# EAGLE board ScorekeeperSchematic (EAGLE 9.5.0)
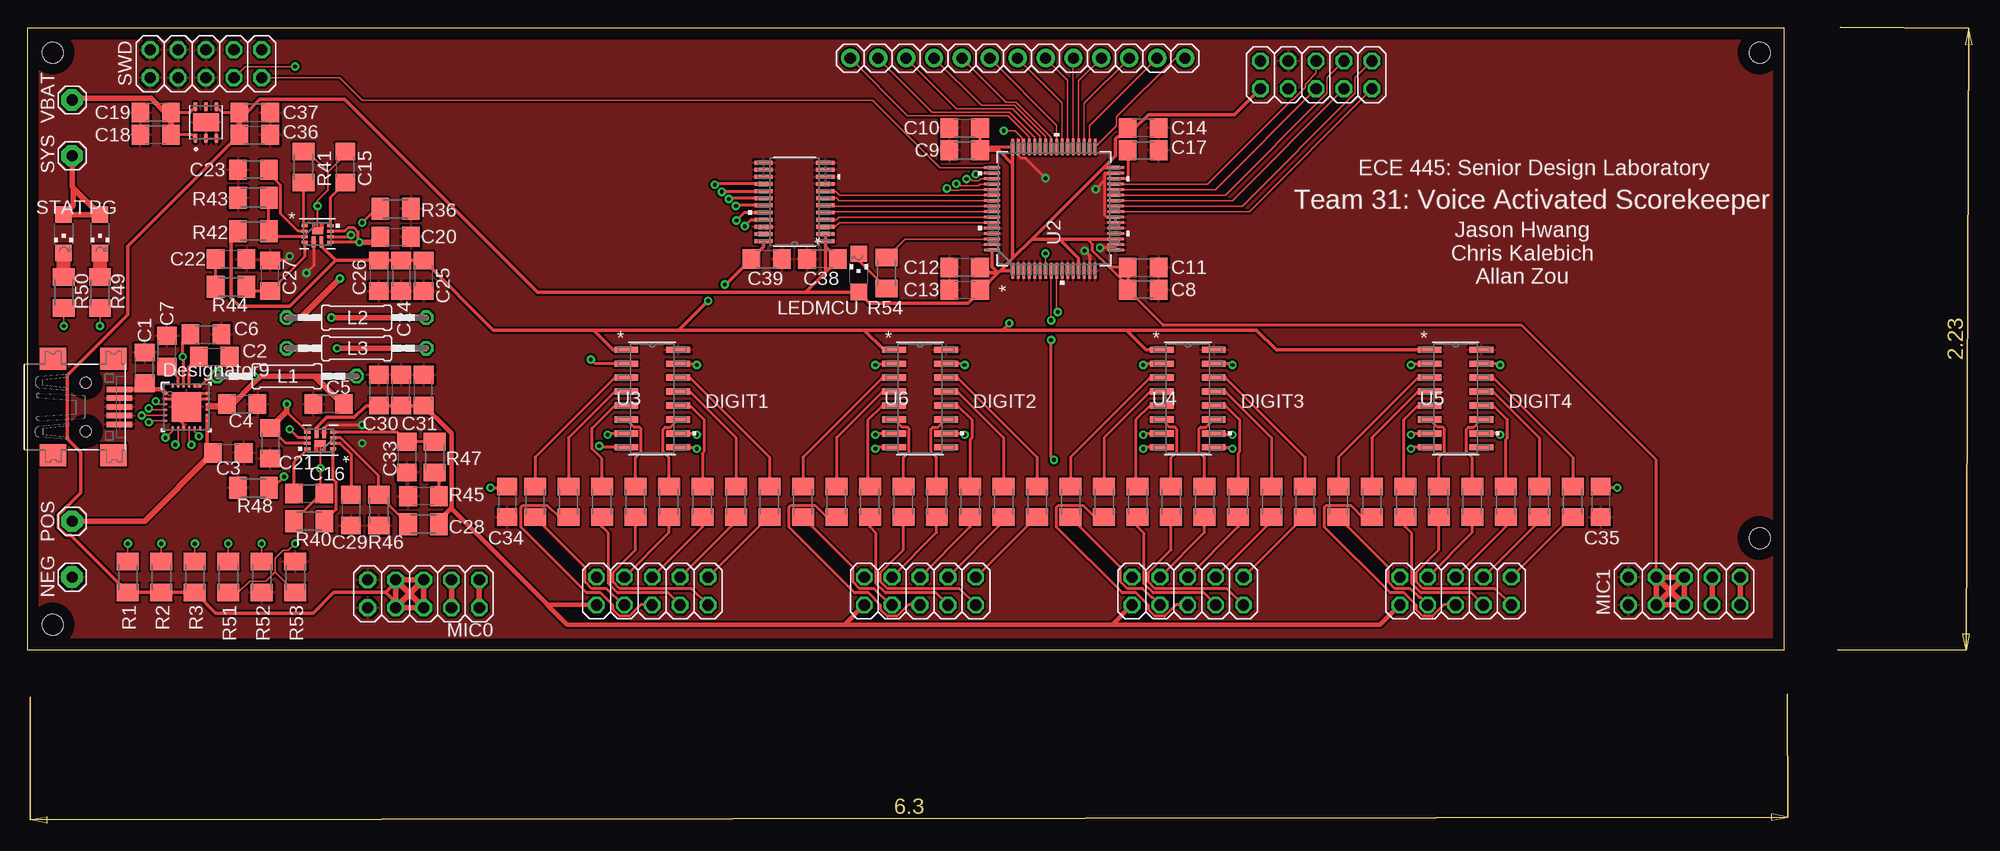
[diagram p0: board, top side]
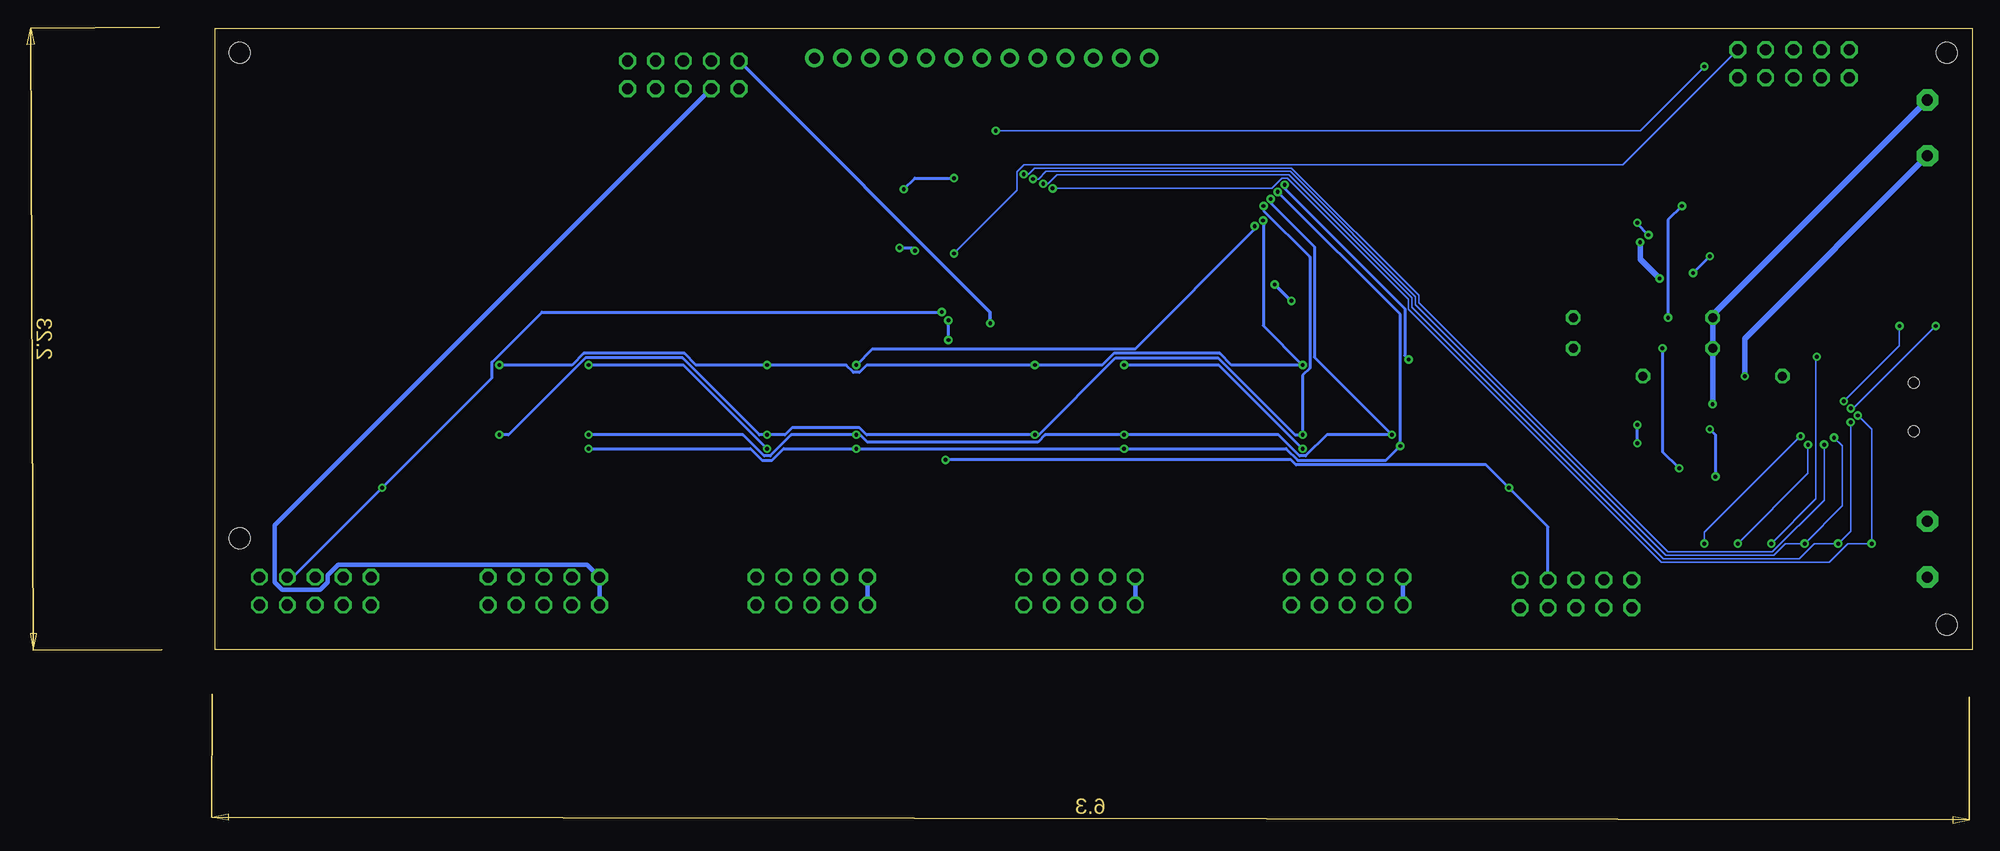
[diagram p1: board, bottom side, seen from below]

Size 160 x 56.57 mm. Coordinates in mm from the lower left corner, seen from the top.
Outline: 0,0 160,0 160,56.57 0,56.57 0,0
Copper layers (1*16): Top 0.035mm / dielectric 1.5mm / Bottom 0.035mm
Design rules "default": minimum track width 6mil, minimum drill 0.35mm, track to track 6mil, track to pad 6mil, pad to pad 6mil, via to via 6mil, smd to smd 6mil, copper to edge 40mil, drill to drill 6mil, minimum pad ring 10mil, minimum via ring 8mil, stop-mask expansion 4mil, vias tented up to drill 0mil, thermal gap 10mil
Holes 1.91 mm at 2.29,54.36 157.73,54.36 157.73,10.16 2.29,2.29

## Footprints (pad centres in the part's own frame; a part is rotated, then mirrored left to right if it is on the bottom)
RNR0011A = smd 0.559 x 0.254: 1 -1.175,0.75; 2 -1.175,0.25; 3 -1.175,-0.25; 4 -1.175,-0.75; 7 1.175,-0.75; 8 1.175,-0.25; 9 1.175,0.25; 10 1.175,0.75 | smd 0.356 x 0.991: 5 -0.35,-0.7; 6 0.35,-0.7 | smd 0.991 x 0.61: 11 0,0.295
RTW0024H = smd 0.36 x 0.24: 1 -1.9,1.25; 2 -1.9,0.75; 3 -1.9,0.25; 4 -1.9,-0.25; 5 -1.9,-0.75; 6 -1.9,-1.25; 13 1.9,-1.25; 14 1.9,-0.75; 15 1.9,-0.25; 16 1.9,0.25; 17 1.9,0.75; 18 1.9,1.25 | smd 0.24 x 0.36: 7 -1.25,-1.9; 8 -0.75,-1.9; 9 -0.25,-1.9; 10 0.25,-1.9; 11 0.75,-1.9; 12 1.25,-1.9; 19 1.25,1.9; 20 0.75,1.9; 21 0.25,1.9; 22 -0.25,1.9; 23 -0.75,1.9; 24 -1.25,1.9 | smd 2.7 x 2.7: 25 0,0 | smd 0.5 x 0.5: V 0,-1.1
C1206 = smd 1.6 x 1.8: 1 -1.4,0; 2 1.4,0
USB-MINIB = smd 0.5 x 2.308: D+ 0,4.064; D- -0.8,4.064; GND 1.6,4.064; ID 0.8,4.064; VBUS -1.6,4.064 | smd 2 x 2.4: GND1 -4.4,-2; GND2 -4.4,3.5; GND3 4.4,3.5; GND4 4.4,-2 | hole 1: -2.2,1; 2.2,1
2X05 = drill 1.016 octagon: 1 -5.08,-1.27; 2 -5.08,1.27; 3 -2.54,-1.27; 4 -2.54,1.27; 5 0,-1.27; 6 0,1.27; 7 2.54,-1.27; 8 2.54,1.27; 9 5.08,-1.27; 10 5.08,1.27
1X13-BIG = drill 1.016 pad 1.676: 1 -15.24,0; 2 -12.7,0; 3 -10.16,0; 4 -7.62,0; 5 -5.08,0; 6 -2.54,0; 7 0,0; 8 2.54,0; 9 5.08,0; 10 7.62,0; 11 10.16,0; 12 12.7,0; 13 15.24,0
0207/12 = drill 0.813 octagon: 1 -6.35,0; 2 6.35,0
CHIPLED_1206 = smd 1.5 x 1.5: A 0,-1.75; C 0,1.75
1X01 = drill 1.016 pad 1.93 octagon: 1 0,0
M1206 = smd 1.6 x 2: 1 -1.4,0; 2 1.4,0
SON95P300X300X100-7N = smd 0.84 x 0.4: 1 -1.435,0.95; 2 -1.435,0; 3 -1.435,-0.95; 4 1.435,-0.95; 5 1.435,0; 6 1.435,0.95 | smd 1.625 x 2.365: 7 0,0
LQFP-64 = smd 1.462 x 0.239: 1 -5.626,3.75; 2 -5.626,3.25; 3 -5.626,2.75; 4 -5.626,2.25; 5 -5.626,1.75; 6 -5.626,1.25; 7 -5.626,0.75; 8 -5.626,0.25; 9 -5.626,-0.25; 10 -5.626,-0.75; 11 -5.626,-1.25; 12 -5.626,-1.75; 13 -5.626,-2.25; 14 -5.626,-2.75; 15 -5.626,-3.25; 16 -5.626,-3.75; 33 5.626,-3.75; 34 5.626,-3.25; 35 5.626,-2.75; 36 5.626,-2.25; 37 5.626,-1.75; 38 5.626,-1.25; 39 5.626,-0.75; 40 5.626,-0.25; 41 5.626,0.25; 42 5.626,0.75; 43 5.626,1.25; 44 5.626,1.75; 45 5.626,2.25; 46 5.626,2.75; 47 5.626,3.25; 48 5.626,3.75 | smd 0.239 x 1.462: 17 -3.75,-5.626; 18 -3.25,-5.626; 19 -2.75,-5.626; 20 -2.25,-5.626; 21 -1.75,-5.626; 22 -1.25,-5.626; 23 -0.75,-5.626; 24 -0.25,-5.626; 25 0.25,-5.626; 26 0.75,-5.626; 27 1.25,-5.626; 28 1.75,-5.626; 29 2.25,-5.626; 30 2.75,-5.626; 31 3.25,-5.626; 32 3.75,-5.626; 49 3.75,5.626; 50 3.25,5.626; 51 2.75,5.626; 52 2.25,5.626; 53 1.75,5.626; 54 1.25,5.626; 55 0.75,5.626; 56 0.25,5.626; 57 -0.25,5.626; 58 -0.75,5.626; 59 -1.25,5.626; 60 -1.75,5.626; 61 -2.25,5.626; 62 -2.75,5.626; 63 -3.25,5.626; 64 -3.75,5.626
D16 = smd 2.173 x 0.568: 1 -2.362,4.445; 2 -2.362,3.175; 3 -2.362,1.905; 4 -2.362,0.635; 5 -2.362,-0.635; 6 -2.362,-1.905; 7 -2.362,-3.175; 8 -2.362,-4.445; 9 2.362,-4.445; 10 2.362,-3.175; 11 2.362,-1.905; 12 2.362,-0.635; 13 2.362,0.635; 14 2.362,1.905; 15 2.362,3.175; 16 2.362,4.445
PW24 = smd 1.676 x 0.356: 1 -2.819,3.575; 2 -2.819,2.925; 3 -2.819,2.275; 4 -2.819,1.625; 5 -2.819,0.975; 6 -2.819,0.325; 7 -2.819,-0.325; 8 -2.819,-0.975; 9 -2.819,-1.625; 10 -2.819,-2.275; 11 -2.819,-2.925; 12 -2.819,-3.575; 13 2.819,-3.575; 14 2.819,-2.925; 15 2.819,-2.275; 16 2.819,-1.625; 17 2.819,-0.975; 18 2.819,-0.325; 19 2.819,0.325; 20 2.819,0.975; 21 2.819,1.625; 22 2.819,2.275; 23 2.819,2.925; 24 2.819,3.575

## Placement (x,y rotation side)
5VBOOST  TPS61089RNRR  [RNR0011A]  26.42,37.85 0 top
12VBOOST  TPS61089RNRR  [RNR0011A]  26.67,19.05 180 top
BQ25896  Value  [RTW0024H]  14.48,22.1 0 top
C1  1uF  [C1206]  10.67,25.65 90 top
C2  4.7nF  [C1206]  17.02,26.67 0 top
C3  10uF  [C1206]  18.29,17.91 0 top
C4  10uF  [C1206]  19.56,22.35 0 top
C5  10uF  [C1206]  27.43,22.35 180 top
C6  4.7uF  [C1206]  16.26,28.7 0 top
C7  8.2uf  [C1206]  12.7,27.18 90 top
C8  4.7uF  [C1206]  101.6,32.77 180 top
C9  100nF  [C1206]  85.34,45.47 0 top
C10  1uF  [C1206]  85.34,47.5 0 top
C11  100nF  [C1206]  101.6,34.8 0 top
C12  100nF  [C1206]  85.34,34.8 180 top
C13  100nF  [C1206]  85.34,32.77 0 top
C14  100uF  [C1206]  101.6,47.5 180 top
C15  0.1uF  [C1206]  28.96,43.94 90 top
C16  0.1uF  [C1206]  25.65,14.22 0 top
C17  4.7uF  [C1206]  101.6,45.47 0 top
C18  0.1uF  [C1206]  11.68,46.86 180 top
C19  1uF  [C1206]  11.68,48.9 180 top
C20  22uF  [C1206]  33.53,37.59 0 top
C21  22uF  [C1206]  22.1,18.8 270 top
C22  4.7nF  [C1206]  18.54,35.56 0 top
C23  2.2uF  [C1206]  20.57,43.69 180 top
C24  22uF  [C1206]  34.04,34.04 270 top
C25  22uF  [C1206]  36.07,34.04 270 top
C26  22uF  [C1206]  32,34.04 270 top
C27  10pF  [C1206]  22.1,34.04 90 top
C28  4.7nF  [C1206]  36.07,13.97 180 top
C29  2.2uF  [C1206]  29.46,12.7 270 top
C30  22uF  [C1206]  36.07,23.62 90 top
C31  22uF  [C1206]  34.04,23.62 90 top
C32  22uF  [C1206]  32,23.62 90 top
C33  10pF  [C1206]  34.54,17.53 270 top
C34  1uF  [C1206]  43.69,13.46 270 top
C35  [C1206]  143.26,13.46 270 top
C36  1uF  [C1206]  20.7,46.86 0 top
C37  0.1uF  [C1206]  20.7,48.9 0 top
C38  0.1uF  [C1206]  72.39,35.56 180 top
C39  0.1uF  [C1206]  67.31,35.56 0 top
CN1  [USB-MINIB]  4.32,22.1 270 top
DIGIT1  [2X05]  56.9,5.33 0 top
DIGIT2  [2X05]  81.28,5.33 0 top
DIGIT3  [2X05]  105.66,5.33 0 top
DIGIT4  [2X05]  130.05,5.33 0 top
JP1  [2X05]  117.35,52.32 0 top
JP2  [1X13-BIG]  90.17,53.85 0 top
L1  1uH  [0207/12]  23.62,24.89 0 top
L2  1.8uH  [0207/12]  29.97,30.23 0 top
L3  1.8uH  [0207/12]  29.97,27.43 0 top
LEDMCU  [CHIPLED_1206]  75.69,34.29 0 top
MIC0  [2X05]  36.07,5.08 0 top
MIC1  [2X05]  150.88,5.33 0 top
NEG  [1X01]  4.06,6.6 0 top
PG  [CHIPLED_1206]  6.6,37.85 180 top
POS  [1X01]  4.06,11.68 0 top
R1  10kO  [M1206]  9.14,6.6 90 top
R2  10kO  [M1206]  12.19,6.6 90 top
R3  10kO  [M1206]  15.24,6.6 90 top
R4  [M1206]  46.23,13.46 270 top
R5  [M1206]  49.28,13.46 270 top
R6  [M1206]  52.32,13.46 270 top
R7  [M1206]  55.37,13.46 270 top
R8  [M1206]  58.42,13.46 270 top
R9  [M1206]  61.47,13.46 270 top
R10  [M1206]  64.52,13.46 270 top
R11  [M1206]  67.56,13.46 270 top
R12  [M1206]  91.95,13.46 270 top
R13  [M1206]  88.9,13.46 270 top
R14  [M1206]  85.85,13.46 270 top
R15  [M1206]  82.8,13.46 270 top
R16  [M1206]  79.76,13.46 270 top
R17  [M1206]  76.71,13.46 270 top
R18  [M1206]  73.66,13.46 270 top
R19  [M1206]  70.61,13.46 270 top
R20  [M1206]  95,13.46 270 top
R21  [M1206]  98.04,13.46 270 top
R22  [M1206]  101.09,13.46 270 top
R23  [M1206]  104.14,13.46 270 top
R24  [M1206]  107.19,13.46 270 top
R25  [M1206]  110.24,13.46 270 top
R26  [M1206]  113.28,13.46 270 top
R27  [M1206]  116.33,13.46 270 top
R28  [M1206]  140.72,13.46 270 top
R29  [M1206]  137.67,13.46 270 top
R30  [M1206]  134.62,13.46 270 top
R31  [M1206]  131.57,13.46 270 top
R32  [M1206]  128.52,13.46 270 top
R33  [M1206]  125.48,13.46 270 top
R34  [M1206]  122.43,13.46 270 top
R35  [M1206]  119.38,13.46 270 top
R36  127kO  [M1206]  33.53,40.13 180 top
R40  300kO  [M1206]  25.65,11.68 180 top
R41  300kO  [M1206]  25.15,43.94 90 top
R42  309kO  [M1206]  20.57,38.1 180 top
R43  100kO  [M1206]  20.57,41.15 0 top
R44  17.4kO  [M1206]  18.54,33.02 0 top
R45  898kO  [M1206]  36.07,11.43 0 top
R46  102kO  [M1206]  32,12.7 90 top
R47  17.4kO  [M1206]  37.08,17.53 90 top
R48  127kO  [M1206]  20.57,14.73 0 top
R49  [M1206]  6.6,32.51 270 top
R50  [M1206]  3.3,32.51 270 top
R51  10kO  [M1206]  18.29,6.6 90 top
R52  260 O  [M1206]  21.34,6.6 90 top
R53  10kO  [M1206]  24.38,6.6 270 top
R54  [M1206]  78.23,34.29 270 top
STAT  [CHIPLED_1206]  3.3,37.85 180 top
SWD  [2X05]  16.26,53.34 180 top
SYS  [1X01]  4.06,44.96 0 top
U1  LD39050PU33R  [SON95P300X300X100-7N]  16.26,48.01 90 top
U2  STM32F401RCT6  [LQFP-64]  93.47,40.13 90 top
U3  TPIC6C596DRQ1  [D16]  56.9,22.86 0 top
U4  TPIC6C596DRQ1  [D16]  105.66,22.86 0 top
U5  TPIC6C596DRQ1  [D16]  130.05,22.86 0 top
U6  TPIC6C596DRQ1  [D16]  81.28,22.86 0 top
U7  SN74LVCC3245APWR  [PW24]  69.85,40.77 180 top
VBAT  [1X01]  4.06,50.04 0 top

## Library data of the parts
5VBOOST 12VBOOST = Scorekeeper; MANUFACTURER_PART_NUMBER: TPS61089RNRR; VENDOR: Texas Instruments
BQ25896 = Scorekeeper; ALTERNATEPARTNUMBER: BQ25896RTWT; APPLICATION_BUILDNUMBER: *; COMPTYPE: IC; MANUFACTURER: Texas Instruments; MOUNTTYPE: SMT; PACKAGEREFERENCE: RTW0024H; PARTNUMBER: BQ25896RTWR; PIN_COUNT: 25; REFDES: RefDes; ROHS: Y; TYPE: TYPE
C1-C39 CN1 JP2 LEDMCU NEG PG POS R1-R36 R40-R54 STAT SYS VBAT = adafruit
DIGIT1-DIGIT4 JP1 MIC0 MIC1 SWD = pinhead
L1-L3 = rcl; SPICEPREFIX: L
U1 = LD39050PU33R; DESCRIPTION: LDO Regulator Pos 3.3V 0.5A 6-Pin DFN EP T/R; DIGI-KEY_PART_NUMBER: 497-8716-1-ND; DIGI-KEY_PURCHASE_URL: https://www.digikey.com/product-detail/en/stmicroelectronics/LD39050PU33R/497-8716-1-ND/2039901?utm_source=snapeda&utm_medium=aggregator&utm_campaign=symbol; MF: STMicroelectronics; MP: LD39050PU33R; PACKAGE: DFN-6 STMicroelectronics
U2 = Scorekeeper; MANUFACTURER_PART_NUMBER: STM32F401RCT6; VENDOR: STMicroelectronics
U3-U6 = Scorekeeper; MANUFACTURER_PART_NUMBER: TPIC6C596DRQ1; VENDOR: Texas Instruments
U7 = Scorekeeper; BUILT_BY: EMA_UL_Team; MANUFACTURER: Texas Instruments; MANUFACTURER_PART_NUMBER: SN74LVCC3245APWR; VENDOR: Texas Instruments

## Nets
1A: R4.1 U3.3
1B: R5.1 U3.4
1C: R6.1 U3.5
1D: R7.1 U3.6
1E: R8.1 U3.11
1F: R9.1 U3.12
1G: R10.1 U3.13
1P: R11.1 U3.14
2A: R19.1 U6.3
2B: R18.1 U6.4
2C: R17.1 U6.5
2D: R16.1 U6.6
2E: R15.1 U6.11
2F: R14.1 U6.12
2G: R13.1 U6.13
2P: R12.1 U6.14
3A: R20.1 U4.3
3B: R21.1 U4.4
3C: R22.1 U4.5
3D: R23.1 U4.6
3E: R24.1 U4.11
3F: R25.1 U4.12
3G: R26.1 U4.13
3P: R27.1 U4.14
4A: R35.1 U5.3
4B: R34.1 U5.4
4C: R33.1 U5.5
4D: R32.1 U5.6
4E: R31.1 U5.11
4F: R30.1 U5.12
4G: R29.1 U5.13
4P: R28.1 U5.14
AGND: 5VBOOST.5 12VBOOST.5 BQ25896.2 BQ25896.9 BQ25896.17 BQ25896.18 BQ25896.25 C1.2 C3.2 C4.2 C5.2 C6.2 C7.2 C8.1 C9.1 C10.1 C11.2 C12.2 C13.1 C14.1 C17.2 C18.2 C19.2 C20.2 C21.2 C22.2 C23.2 C24.2 C25.2 C26.2 C27.2 C28.2 C29.2 C30.2 C31.2 C32.2 C33.2 C34.2 C35.2 C36.2 C37.2 C38.2 C39.2 CN1.D+ CN1.D- CN1.GND CN1.ID JP1.4 MIC0.1 MIC0.2 MIC1.1 MIC1.2 NEG.1 R36.1 R43.1 R46.1 R48.1 R52.1 R53.1 SWD.5 SWD.6 SWD.7 SWD.8 SWD.9 SWD.10 U1.2 U1.3 U1.7 U2.2 U2.3 U2.4 U2.5 U2.6 U2.10 U2.11 U2.12 U2.14 U2.15 U2.16 U2.17 U2.18 U2.20 U2.21 U2.22 U2.23 U2.31 U2.47 U2.60 U2.61 U2.63 U3.16 U4.16 U5.16 U6.16 U7.9 U7.10 U7.11 U7.12 U7.13 U7.14 U7.15 U7.22
BAT_POS: BQ25896.13 BQ25896.14 C3.1 POS.1
CLEARH: U3.7 U4.7 U5.7 U6.7 U7.18
CLEARL: U2.56 U7.6
G_H: U3.8 U4.8 U5.8 U6.8 U7.17
G_L: U2.55 U7.7
INT: BQ25896.7 R3.2 U2.51
LED: R54.1 U2.62
LISTEN: JP1.5 U2.28
MIC0: C34.1 MIC0.7 MIC0.8 U2.8
MIC1: C35.1 MIC1.7 MIC1.8 U2.9
N$1: BQ25896.1 C1.1 CN1.VBUS
N$2: U3.9 U6.2
N$3: BQ25896.19 BQ25896.20 C2.2 L1.1
N$4: BQ25896.21 C2.1
N$5: JP2.13 U2.33
N$6: BQ25896.11 R51.1 R53.2
N$7: JP2.12 U2.34
N$8: BQ25896.23 C7.1
N$9: JP2.11 U2.35
N$10: U4.9 U5.2
N$11: 12VBOOST.11 C16.2 L3.2 R40.2
N$12: 5VBOOST.11 C15.2 L2.2 R41.2
N$13: JP2.10 U2.36
N$14: C17.1 U2.30
N$15: DIGIT1.4 R8.2
N$16: DIGIT1.6 R9.2
N$17: DIGIT1.8 R10.2
N$18: DIGIT1.10 R11.2
N$19: DIGIT3.4 R24.2
N$20: DIGIT3.6 R25.2
N$21: DIGIT3.8 R26.2
N$22: DIGIT3.10 R27.2
N$23: DIGIT2.4 R15.2
N$24: DIGIT2.10 R12.2
N$25: DIGIT2.8 R13.2
N$26: DIGIT2.6 R14.2
N$27: DIGIT4.10 R28.2
N$28: DIGIT2.9 R16.2
N$29: DIGIT2.7 R17.2
N$30: DIGIT2.5 R18.2
N$31: DIGIT2.3 R19.2
N$32: DIGIT4.8 R29.2
N$33: DIGIT4.6 R30.2
N$34: DIGIT4.4 R31.2
N$35: JP2.9 U2.37
N$36: DIGIT4.9 R32.2
N$37: DIGIT4.7 R33.2
N$38: DIGIT4.5 R34.2
N$39: DIGIT4.3 R35.2
N$40: JP2.8 U2.38
N$41: JP2.7 U2.39
N$42: JP2.6 U2.40
N$43: JP2.5 U2.41
N$44: PG.C R49.1
N$45: R50.1 STAT.C
N$46: BQ25896.3 R49.2
N$47: LEDMCU.C R54.2
N$48: JP2.4 U2.42
N$49: JP2.3 U2.43
N$50: DIGIT1.9 R7.2
N$51: DIGIT1.7 R6.2
N$52: DIGIT1.5 R5.2
N$53: DIGIT1.3 R4.2
N$54: JP2.2 U2.44
N$55: JP2.1 U2.45
N$66: DIGIT3.9 R23.2
N$67: DIGIT3.7 R22.2
N$68: DIGIT3.5 R21.2
N$69: DIGIT3.3 R20.2
N$96: 5VBOOST.10 C15.1
N$97: 12VBOOST.10 C16.1
N$98: 12VBOOST.1 R40.1
N$99: 5VBOOST.2 C23.1
N$100: 5VBOOST.1 R41.1
N$101: 5VBOOST.3 R42.1 R43.2
N$102: C22.1 R44.1
N$103: 5VBOOST.4 C27.1 R44.2
N$104: 5VBOOST.8 R36.2
N$105: 12VBOOST.2 C29.1
N$106: 12VBOOST.3 R45.1 R46.2
N$107: C28.1 R47.1
N$108: 12VBOOST.4 C33.1 R47.2
N$109: 12VBOOST.8 R48.2
N$111: BQ25896.22 C6.1 R51.2
N$112: MIC0.9 MIC0.10
N$113: BQ25896.10 R52.2
N$116: MIC1.9 MIC1.10
NRST: SWD.1 U2.7
OTG: BQ25896.8 U2.50
RCKH: U3.10 U4.10 U5.10 U6.10 U7.19
RCKL: U2.57 U7.5
RESET: JP1.6 U2.29
SCL: BQ25896.5 R1.2 U2.53
SDA: BQ25896.6 R2.2 U2.52
SRCKH: U3.15 U4.15 U5.15 U6.15 U7.20
SRCKL: U2.58 U7.4
STAT: BQ25896.4 R50.2
SWCLK: SWD.2 U2.49
SWDIO: SWD.4 U2.46
SYS: BQ25896.15 BQ25896.16 C4.1 C5.1 L1.2 PG.A STAT.A SYS.1
T1DOWN: JP1.9 U2.24
T1UP: JP1.7 U2.26
T2DOWN: JP1.10 U2.25
T2UP: JP1.8 U2.27
TEAM1H: U3.2 U7.16
TEAM1L: U2.54 U7.8
TEAM2H: U4.2 U7.21
TEAM2L: U2.59 U7.3
VBAT: 5VBOOST.7 5VBOOST.9 12VBOOST.7 12VBOOST.9 C18.1 C19.1 C20.1 C21.1 L2.1 L3.1 U1.1 U1.6 VBAT.1
VREF5: 5VBOOST.6 C24.1 C25.1 C26.1 C39.1 JP1.2 R42.2 U3.1 U4.1 U5.1 U6.1 U7.24
VREF12: 12VBOOST.6 C30.1 C31.1 C32.1 DIGIT1.1 DIGIT1.2 DIGIT2.1 DIGIT2.2 DIGIT3.1 DIGIT3.2 DIGIT4.1 DIGIT4.2 JP1.3 R45.2
VREF33: C8.2 C9.2 C10.2 C11.1 C12.1 C13.2 C14.2 C36.1 C37.1 C38.1 JP1.1 LEDMCU.A MIC0.3 MIC0.4 MIC0.5 MIC0.6 MIC1.3 MIC1.4 MIC1.5 MIC1.6 R1.1 R2.1 R3.1 U1.4 U2.1 U2.13 U2.19 U2.32 U2.48 U2.64 U7.1 U7.2

## Tracks (layer width: path | path; a pad name or v marks a point on that pad's centre or on a via)
1A
  Top 0.254: U3.3 53.47,24.77 46.23,17.53 R4.1
1B
  Top 0.254: U3.4 53.47,23.5 49.28,19.3 R5.1
1C
  Top 0.254: U3.5 53.47,22.23 51.41,20.17 51.41,18.27 52.32,17.36 R6.1
1D
  Top 0.254: U3.6 55.24,20.25 55.74,20.25 55.9,20.09 55.9,18.02 55.37,17.49 R7.1
1E
  Top 0.254: U3.11 58.55,20.25 58.06,20.25 57.89,20.09 57.89,18.02 58.42,17.49 R8.1
1F
  Top 0.254: U3.12 60.33,22.23 61.62,20.93 61.62,18.02 61.47,17.87 R9.1
1G
  Top 0.254: U3.13 60.33,23.5 64.52,19.3 R10.1
1P
  Top 0.254: U3.14 60.33,24.77 67.56,17.53 R11.1
2A
  Top 0.254: U6.3 77.85,24.77 70.61,17.53 R19.1
2B
  Top 0.254: U6.4 77.85,23.5 73.66,19.3 R18.1
2C
  Top 0.254: U6.5 77.85,22.23 76.56,20.93 76.56,15.01 R17.1
2D
  Top 0.254: U6.6 79.62,20.25 80.12,20.25 80.28,20.09 80.28,18.02 79.76,17.49 R16.1
2E
  Top 0.254: U6.11 82.94,20.25 82.44,20.25 82.28,20.09 82.28,18.02 82.8,17.49 R15.1
2F
  Top 0.254: U6.12 84.71,22.23 86,20.93 86,19.29 85.85,19.14 R14.1
2G
  Top 0.254: U6.13 84.71,23.5 88.9,19.3 R13.1
2P
  Top 0.254: U6.14 84.71,24.77 91.95,17.53 R12.1
3A
  Top 0.254: U4.3 102.23,24.77 95,17.53 R20.1
3B
  Top 0.254: U4.4 102.23,23.5 98.04,19.3 R21.1
3C
  Top 0.254: U4.5 102.23,22.23 100.97,20.95 100.97,19.85 100.94,19.83 100.94,15.01 R22.1
3D
  Top 0.254: U4.6 104.01,20.25 104.5,20.25 104.67,20.09 104.67,18.02 104.14,17.49 R23.1
3E
  Top 0.254: U4.11 107.32,20.25 106.82,20.25 106.66,20.09 106.66,18.02 107.19,17.49 R24.1
3F
  Top 0.254: U4.12 109.09,22.23 110.39,20.93 110.39,18.02 110.24,17.87 R25.1
3G
  Top 0.254: U4.13 109.09,23.5 113.28,19.3 R26.1
3P
  Top 0.254: U4.14 109.09,24.77 116.33,17.53 R27.1
4A
  Top 0.254: U5.3 126.62,24.77 119.38,17.53 R35.1
4B
  Top 0.254: U5.4 126.62,23.5 122.43,19.3 R34.1
4C
  Top 0.254: U5.5 126.62,22.23 125.33,20.93 125.33,15.01 R33.1
4D
  Top 0.254: U5.6 128.39,20.25 128.89,20.25 129.05,20.09 129.05,18.02 128.52,17.49 R32.1
4E
  Top 0.254: U5.11 131.7,20.25 131.21,20.25 131.04,20.09 131.04,18.02 131.57,17.49 R31.1
4F
  Top 0.254: R30.1 134.62,19.14 134.77,19.29 134.77,20.93 133.48,22.23 U5.12
4G
  Top 0.254: U5.13 133.48,23.5 137.67,19.3 R29.1
4P
  Top 0.254: U5.14 133.48,24.77 140.72,17.53 R28.1
AGND  (via drill 0.35)
  Top 0.254: BQ25896.2 13.73,22.85 BQ25896.25 | BQ25896.25 15.73,23.35 BQ25896.18 | BQ25896.25 15.23,22.85 BQ25896.17 | BQ25896.25 14.48,21.75 13.95,21.22 13.95,20.78 14.23,20.5 BQ25896.9 | U2.23 99.09,39.37 98.3,39.37 98.09,39.58 98.09,43.36 98.11,43.38 U2.31 99,43.29 98.26,43.29 98.09,43.12 98.09,42.72 v97.28,41.91 | 12VBOOST.5 27.02,20.16 27.32,20.46 v30.48,20.46 | v92.71,42.93 90.89,44.75 90.49,44.75 90.22,45.01 U2.47 | U2.18 98.79,36.58 v97.66,36.58 | v96.27,36.32 96.72,35.87 U2.15 | 5VBOOST.5 26.07,34.96 v25.4,34.29 | v23.88,35.81 23.5,35.44 C27.2
  Bottom 0.254: v97.28,41.91 96.27,42.93 v92.71,42.93 | v97.66,36.58 96.52,36.58 v96.27,36.32 | v25.4,34.29 v23.88,35.81 | v30.48,18.8 v30.48,20.46
  pour Top (isolate 0.178): 0.25,56.39 159.77,56.39 159.77,0.25 0.25,0.25
BAT_POS
  Top 0.254: BQ25896.14 BQ25896.13
  Top 0.33: C3.1 16.38,18.42 BQ25896.14
  Top 0.508: POS.1 10.66,11.68 C3.1
CLEARH  (via drill 0.35)
  Top 0.254: v52.83,19.56 52.96,19.68 U3.7 | v77.22,19.56 77.34,19.68 U6.7 | v101.6,19.56 101.73,19.68 U4.7 | v125.98,19.56 126.11,19.68 U5.7 | U7.18 63.94,41.09 v63.87,41.03
  Bottom 0.254: v125.98,19.56 111.93,19.56 110,17.63 109.46,17.63 107.53,19.56 v101.6,19.56 101.25,19.56 100.59,18.9 85.07,18.9 84.41,19.56 v77.22,19.56 63.16,19.56 61.23,17.63 60.69,17.63 58.76,19.56 v52.83,19.56 59.9,26.62 59.9,36.7 63.87,40.67 v63.87,41.03
CLEARL
  Top 0.152: U2.56 72.73,40.38 U7.6
G_H  (via drill 0.35)
  Top 0.254: U3.8 52.2,18.41 v52.07,18.54 | U6.8 77.34,18.41 v77.22,18.29 | U4.8 101.73,18.41 v101.6,18.29 | U5.8 126.11,18.41 v125.98,18.29 | v63.23,41.67 63.3,41.74 U7.17
  Bottom 0.254: v125.98,18.29 111.23,18.29 110.17,17.22 109.29,17.22 108.22,18.29 v101.6,18.29 v77.22,18.29 62.47,18.29 61.4,17.22 53.39,17.22 v52.07,18.54 52.07,30.51 v63.23,41.67
G_L
  Top 0.152: U2.55 73.93,40.88 73.66,41.15 72.72,41.15 U7.7
INT  (via drill 0.35)
  Top 0.152: BQ25896.7 13.23,19.94 12.86,19.58 12.85,19.58 v12.57,19.3 | v15.24,9.65 R3.2 | U2.51 86.83,42.88 86.61,42.67 86.11,42.67 85.94,42.84 v85.51,42.84
  Bottom 0.152: v12.57,19.3 11.81,18.54 11.81,13.08 v15.24,9.65 17,9.65 18.07,8.59 27.89,8.59 50.7,31.39 50.7,32.14 62.08,43.53 84.33,43.53 85.02,42.84 v85.51,42.84
LED
  Top 0.152: U2.62 79.92,37.38 R54.1
LISTEN
  Top 0.152: JP1.5 108.18,41.88 U2.28
MIC0  (via drill 0.35)
  Top 0.152: v93.22,29.97 U2.8
  Top 0.254: v42.16,14.73 43.56,14.73 C34.1 | v93.47,17.27 93.22,17.53 v93.22,28.19
  Top 0.508: MIC0.7 MIC0.8
  Bottom 0.254: MIC0.8 38.61,11.18 v42.16,14.73 44.25,16.82 61.57,16.82 62.02,17.27 v93.47,17.27 | v93.22,28.19 v93.22,29.97
MIC1  (via drill 0.35)
  Top 0.152: v93.83,30.73 93.72,30.84 U2.9
  Top 0.254: v144.78,14.73 143.39,14.73 C35.1
  Top 0.508: MIC1.7 MIC1.8
  Bottom 0.254: MIC1.8 152.91,6.6 v144.78,14.73 134.77,24.74 134.77,26.18 130.22,30.73 v93.83,30.73
N$1
  Top 0.406: CN1.VBUS 10.11,23.7 | 10.11,23.7 12.23,23.7 BQ25896.1 | C1.1 10.11,23.7
N$2  (via drill 0.35)
  Top 0.254: U3.9 60.83,18.41 v60.96,18.29 | v77.22,25.91 77.34,26.04 U6.2
  Bottom 0.254: v60.96,18.29 68.58,25.91 v77.22,25.91
N$3
  Top 0.254: BQ25896.20 BQ25896.19 | C2.2 18.4,26.67 BQ25896.19 | BQ25896.19 16.62,24.89 L1.1
N$4
  Top 0.254: BQ25896.21 14.73,25.78 C2.1
N$5
  Top 0.152: U2.33 99.17,47.71 99.17,48.49 104.53,53.85 JP2.13
N$6  (via drill 0.35)
  Top 0.152: v15.62,19.43 15.23,19.82 BQ25896.11 | R51.1 19.21,5.2 20.24,6.23 21.69,6.23 22.57,7.11 | v24.38,9.65 23.77,9.03 23.29,9.03 22.57,8.31 22.57,7.11 | R53.2 22.57,7.02 22.57,7.11
  Bottom 0.152: v24.38,9.65 24.38,10.67 v15.62,19.43
N$7
  Top 0.152: U2.34 96.72,47.7 JP2.12
N$8
  Top 0.254: BQ25896.23 13.73,24.75 C7.1
N$9
  Top 0.152: U2.35 96.22,49.74 JP2.11
N$10  (via drill 0.35)
  Top 0.254: U4.9 109.6,18.41 v109.73,18.29 | v125.98,25.91 126.11,26.04 U5.2
  Bottom 0.254: v109.73,18.29 117.35,25.91 v125.98,25.91
N$11  (via drill 0.35)
  Top 0.191: 12VBOOST.11 v26.67,16.51 26.67,14.61
  Top 0.254: 26.67,14.61 C16.2 26.79,14.22 R40.2
  Top 0.508: L3.2 v28.19,27.43
  Bottom 0.254: v26.67,16.51 28.19,18.03 v28.19,27.43
N$12  (via drill 0.35)
  Top 0.191: 5VBOOST.11 v26.42,40.39 26.42,40.89 27.37,41.85 27.37,43.5 | 28.96,45.09 27.37,43.5 | 27.37,43.5 25.65,45.21 25.15,45.21
  Top 0.203: 25.15,45.21 R41.2
  Top 0.254: 28.96,44.96 28.96,45.09 C15.2
  Top 0.508: L2.2 v27.69,30.23
  Bottom 0.254: v26.42,40.39 27.69,39.12 v27.69,30.23
N$13
  Top 0.152: U2.36 95.72,51.78 JP2.10
N$14
  Top 0.254: C17.1 100.2,43.05 100.03,42.88 U2.30
N$15
  Top 0.254: DIGIT1.4 58.42,10.67 R8.2
N$16
  Top 0.254: DIGIT1.6 61.47,11.18 R9.2
N$17
  Top 0.254: DIGIT1.8 64.52,11.68 R10.2
N$18
  Top 0.254: DIGIT1.10 67.43,12.06 R11.2
N$19
  Top 0.254: DIGIT3.4 107.19,10.67 R24.2
N$20
  Top 0.254: DIGIT3.6 110.24,11.18 R25.2
N$21
  Top 0.254: DIGIT3.8 113.28,11.68 R26.2
N$22
  Top 0.254: DIGIT3.10 116.2,12.06 R27.2
N$23
  Top 0.254: DIGIT2.4 82.8,10.67 R15.2
N$24
  Top 0.254: DIGIT2.10 91.82,12.06 R12.2
N$25
  Top 0.254: DIGIT2.8 88.9,11.68 R13.2
N$26
  Top 0.254: DIGIT2.6 85.85,11.18 R14.2
N$27
  Top 0.254: DIGIT4.10 140.59,12.06 R28.2
N$28
  Top 0.254: DIGIT2.9 84.86,5.56 78.31,5.56 77.7,6.17 77.7,7.04 79.76,9.09 R16.2
N$29
  Top 0.254: R17.2 76.71,11.18 77.29,10.59 77.29,6 78.14,5.16 82.73,5.16 DIGIT2.7
N$30
  Top 0.254: DIGIT2.5 80.21,4.06 79.17,3.02 78.31,3.02 77.7,3.63 77.7,4.04 76.58,5.16 75.32,5.16 69.33,11.15 69.33,12.98 69.5,13.14 71.73,13.14 72.81,12.06 R18.2
N$31
  Top 0.254: DIGIT2.3 78.61,4.06 77.11,5.56 75.77,5.56 75.16,6.17 75.16,7.51 R19.2
N$32
  Top 0.254: DIGIT4.8 137.67,11.68 R29.2
N$33
  Top 0.254: DIGIT4.6 134.62,11.18 R30.2
N$34
  Top 0.254: DIGIT4.4 131.57,10.67 R31.2
N$35
  Top 0.152: U2.37 95.22,53.82 JP2.9
N$36
  Top 0.254: DIGIT4.9 133.63,5.56 127.08,5.56 126.47,6.17 126.47,7.04 128.52,9.09 R32.2
N$37
  Top 0.254: R33.2 125.48,11.18 126.06,10.59 126.06,6 126.91,5.16 131.5,5.16 DIGIT4.7
N$38
  Top 0.254: DIGIT4.5 128.98,4.06 127.94,3.02 127.08,3.02 126.47,3.63 126.47,4.04 125.35,5.16 124.09,5.16 118.1,11.15 118.1,12.98 118.26,13.14 120.5,13.14 121.58,12.06 R34.2
N$39
  Top 0.254: DIGIT4.3 126.82,4.75 126.74,4.75 125.93,5.56 124.54,5.56 123.93,6.17 123.93,7.51 R35.2
N$40
  Top 0.152: U2.38 94.72,51.84 JP2.8
N$41
  Top 0.152: U2.39 94.22,49.8 JP2.7
N$42
  Top 0.152: U2.40 93.72,47.76 JP2.6
N$43
  Top 0.152: JP2.5 89.09,49.85 90.03,49.85 93.22,46.66 U2.41
N$44
  Top 1.27: R49.1 PG.C
N$45
  Top 1.27: R50.1 STAT.C
N$46  (via drill 0.35)
  Top 0.152: BQ25896.3 11.94,22.35 v11.68,22.61 | v6.6,29.46 R49.2
  Bottom 0.152: v11.68,22.61 6.6,27.69 v6.6,29.46
N$47
  Top 0.254: R54.2 75.69,35.43 LEDMCU.C
N$48
  Top 0.152: U2.42 92.72,46.72 89.91,49.54 86.86,49.54 JP2.4
N$49
  Top 0.152: U2.43 92.22,46.72 89.7,49.24 84.62,49.24 JP2.3
N$50
  Top 0.254: DIGIT1.9 60.48,5.56 53.92,5.56 53.31,6.17 53.31,7.04 55.37,9.09 R7.2
N$51
  Top 0.254: R6.2 52.32,11.18 52.91,10.59 52.91,6 53.76,5.16 58.34,5.16 DIGIT1.7
N$52
  Top 0.254: R5.2 49.28,11.94 48.55,11.94 47.34,13.14 45.11,13.14 44.95,12.98 44.95,11.15 50.94,5.16 52.2,5.16 53.31,4.04 53.31,3.63 53.92,3.02 54.79,3.02 55.83,4.06 DIGIT1.5
N$53
  Top 0.254: DIGIT1.3 54.23,4.06 52.73,5.56 51.38,5.56 50.77,6.17 50.77,7.51 R4.2
N$54
  Top 0.152: JP2.2 82.39,48.93 89.42,48.93 91.72,46.63 U2.44
N$55
  Top 0.152: U2.45 91.22,46.7 89.3,48.63 80.15,48.63 JP2.1
N$66
  Top 0.254: DIGIT3.9 109.25,5.56 102.69,5.56 102.08,6.17 102.08,7.04 104.14,9.09 R23.2
N$67
  Top 0.254: R22.2 101.09,11.18 101.68,10.59 101.68,6 102.52,5.16 107.11,5.16 DIGIT3.7
N$68
  Top 0.254: DIGIT3.5 104.6,4.06 103.56,3.02 102.69,3.02 102.08,3.63 102.08,4.04 100.97,5.16 99.71,5.16 93.72,11.15 93.72,12.98 93.88,13.14 96.11,13.14 97.19,12.06 R21.2
N$69
  Top 0.254: DIGIT3.3 102.44,4.75 102.36,4.75 101.54,5.56 100.15,5.56 99.54,6.17 99.54,7.51 R20.2
N$96
  Top 0.254: 5VBOOST.10 27.59,41.18 C15.1
N$97
  Top 0.254: 12VBOOST.10 24.3,17.1 24.25,17.06 C16.1
N$98
  Top 0.254: 12VBOOST.1 27.84,15.53 28.13,15.24 28.13,12.76 R40.1
N$99
  Top 0.254: 5VBOOST.2 24.64,38.1 23.05,39.69 23.05,42.26 21.97,43.34 C23.1
N$100
  Top 0.254: 5VBOOST.1 25.15,38.69 R41.1
N$101
  Top 0.254: 5VBOOST.3 22.48,37.6 R42.1 R43.2
N$102
  Top 0.254: R44.1 C22.1
N$103
  Top 0.254: 5VBOOST.4 25.24,35.78 C27.1 20.33,32.64 R44.2
N$104  (via drill 0.35)
  Top 0.254: 5VBOOST.8 29.32,37.6 v29.46,37.74 | v30.48,38.86 31.75,40.13 R36.2
  Bottom 0.254: v29.46,37.74 30.48,38.76 v30.48,38.86
N$105
  Top 0.254: 12VBOOST.2 28.45,18.8 29.46,17.78 C29.1
N$106
  Top 0.254: R45.1 R46.2 32,15.81 28.52,19.3 12VBOOST.3
  Top 0.33: R45.1
N$107
  Top 0.254: C28.1 37.47,15.24 37.47,15.74 R47.1
N$108
  Top 0.254: R47.2 C33.1 33.67,19.8 12VBOOST.4
N$109  (via drill 0.35)
  Top 0.254: 12VBOOST.8 24.64,19.3 v23.88,20.07 | v23.37,15.75 22.35,14.73 R48.2
  Bottom 0.254: v23.88,20.07 23.37,19.56 v23.37,15.75
N$111  (via drill 0.35)
  Top 0.152: v18.29,9.65 R51.2
  Top 0.254: BQ25896.22 14.23,26.57 v14.13,26.67 14.13,27.98 C6.1
  Bottom 0.152: v14.13,26.67 14.22,26.58 14.22,13.72 v18.29,9.65
N$112
  Top 0.508: MIC0.9 MIC0.10
N$113  (via drill 0.35)
  Top 0.152: v21.34,9.65 R52.2 | BQ25896.10 14.73,18.86 v14.94,18.65
  Bottom 0.152: v21.34,9.65 14.94,16.05 v14.94,18.65
N$116
  Top 0.508: MIC1.9 MIC1.10
NRST  (via drill 0.35)
  Top 0.152: U2.7 92.72,36.06 v92.71,36.07
  Bottom 0.152: SWD.1 31.81,44.14 86.35,44.14 86.97,43.53 86.97,41.81 v92.71,36.07
OTG  (via drill 0.35)
  Top 0.152: U2.50 86.47,43.38 v86.36,43.27 | BQ25896.8 13.73,18.93 v13.47,18.67 v13.47,18.66
  Bottom 0.152: v86.36,43.27 85.93,43.27 85.37,43.84 61.96,43.84 50.39,32.27 50.39,31.6 27.69,8.89 18.29,8.89 18.19,8.89 13.47,13.61 v13.47,18.66
RCKH  (via drill 0.35)
  Top 0.254: U3.10 60.83,19.68 v60.96,19.56 | U6.10 85.22,19.68 v85.34,19.56 | v109.73,19.56 108.15,19.56 U4.10 | v134.11,19.56 133.99,19.68 U5.10 | U7.19 64.57,40.44 v64.52,40.39
  Bottom 0.254: v134.11,19.56 133.26,19.56 126.26,26.57 117.43,26.57 110.42,19.56 v109.73,19.56 108.1,19.56 107.44,20.22 101.33,20.22 100.67,19.56 v85.34,19.56 84.99,19.56 77.98,26.57 68.66,26.57 61.66,19.56 v60.96,19.56 60.96,24.98 60.3,25.64 60.3,35.74 64.52,39.96 v64.52,40.39
RCKL
  Top 0.152: U2.57 72.76,39.88 U7.5
RESET
  Top 0.152: U2.29 107.44,42.38 115.12,50.06 115.22,50.06 116.36,51.2 116.36,51.46 117.35,52.45 JP1.6
SCL  (via drill 0.35)
  Top 0.152: BQ25896.5 10.43,21.35 v10.4,21.32 | v9.14,9.65 R1.2 | U2.53 84.9,41.88 84.83,41.81 83.9,41.81 v83.73,41.99
  Bottom 0.152: v10.4,21.32 9.14,20.07 v9.14,9.65 11.33,9.65 13.01,7.98 28.3,7.98 51.31,30.99 51.31,31.89 62.34,42.92 62.84,42.92 63.77,41.99 v83.73,41.99
SDA  (via drill 0.35)
  Top 0.152: BQ25896.6 11.21,20.85 v11.06,20.69 | v12.19,9.65 R2.2 | U2.52 86.76,42.38 86.61,42.23 84.77,42.23 v84.58,42.42
  Bottom 0.152: v11.06,20.69 11.06,10.79 v12.19,9.65 14.38,9.65 15.75,8.28 28.09,8.28 51,31.19 51,32.02 62.21,43.23 83.35,43.23 84.16,42.42 v84.58,42.42
SRCKH  (via drill 0.35)
  Top 0.254: U3.15 60.83,26.04 v60.96,25.91 | v85.34,25.91 85.22,26.04 U6.15 | v109.73,25.91 109.6,26.04 U4.15 | v134.11,25.91 133.99,26.04 U5.15 | U7.20 65.28,39.79 v64.56,39.07
  Bottom 0.254: v134.11,25.91 127.49,25.91 126.42,26.97 117.26,26.97 116.2,25.91 v109.73,25.91 102.53,25.91 101.87,25.25 101.33,25.25 100.67,25.91 v85.34,25.91 79.21,25.91 78.15,26.97 68.5,26.97 67.43,25.91 v60.96,25.91 64.55,29.49 64.55,39.06 v64.56,39.07
SRCKL
  Top 0.152: U2.58 73.93,39.38 73.66,39.12 72.69,39.12 U7.4
STAT  (via drill 0.35)
  Top 0.152: BQ25896.4 11.16,21.85 v11.04,21.96 | v3.3,29.46 R50.2
  Bottom 0.152: v11.04,21.96 10.8,21.96 v3.3,29.46
SWCLK
  Top 0.152: U2.49 83.12,43.88 76.96,50.04 30.48,50.04 28.45,52.07 SWD.2
SWDIO  (via drill 0.35)
  Top 0.152: U2.46 90.57,45.91 90.57,46.58 89.91,47.24 v88.9,47.24 | v24.38,53.09 19.81,53.09 SWD.4
  Bottom 0.152: v88.9,47.24 30.23,47.24 v24.38,53.09
SYS  (via drill 0.35)
  Top 0.254: 16.76,22.35 BQ25896.16 BQ25896.15 16.38,21.96 16.51,22.1 16.76,22.35 | 16.76,22.35 C4.1 | 26.16,24.89 26.29,24.89 | 26.29,24.89 L1.2 | C5.1 26.29,24.89
  Top 0.508: 4.18,42.02 PG.A STAT.A 4.18,40.47 4.18,42.02 | SYS.1 4.06,42.14 4.18,42.02 | 16.51,22.1 17.9,22.1 C4.1 18.68,22.35 20.7,24.37 | 20.7,24.37 21.22,24.89 26.16,24.89 | L1.2 26.16,24.89 | C5.1 28.7,22.35 26.16,24.89 | v20.7,24.89 20.7,24.37
  Bottom 0.508: v20.7,24.89 20.7,28.32 SYS.1
T1DOWN
  Top 0.152: JP1.9 111.26,39.88 U2.24
T1UP
  Top 0.152: JP1.7 109.72,40.88 U2.26
T2DOWN
  Top 0.152: JP1.10 120.88,52.05 120.88,50.64 110.62,40.38 U2.25
T2UP
  Top 0.152: JP1.8 118.34,52.05 118.34,50.64 109.08,41.38 U2.27
TEAM1H  (via drill 0.35)
  Top 0.254: U3.2 51.69,26.04 v51.31,26.42 | U7.16 62.67,42.39 v62.59,42.31
  Bottom 0.254: v62.59,42.31 62.59,41.96 51.66,31.03 51.66,26.77 v51.31,26.42
TEAM1L
  Top 0.152: U7.8 73.57,41.74 73.93,41.38 U2.54
TEAM2H  (via drill 0.35)
  Top 0.254: U4.2 101.73,26.04 v101.6,25.91 | v65.33,38.56 65.91,39.14 U7.21
  Bottom 0.254: v101.6,25.91 100.13,27.38 76.2,27.38 65.33,38.25 v65.33,38.56
TEAM2L
  Top 0.152: U2.59 73.93,38.88 73.54,38.49 U7.3
VBAT  (via drill 0.35)
  Top 0.254: 12VBOOST.7 23.62,21.67 23.62,21.72 | 12VBOOST.9 23.49,18.8 C21.1 | 5VBOOST.7 27.6,37.08 v30.23,37.08 30.12,37.19 30.12,38.01 29.74,38.4 29.19,38.4 28.89,38.1 5VBOOST.9 | U1.6 14.96,49.1 14.76,48.9 13.21,48.9 C19.1 | U1.1 15.01,46.86 C18.1
  Top 0.508: v23.62,22.35 23.62,21.72 C21.1 | L2.1 24.89,30.23 26.54,31.88 v28.45,33.78 | C20.1 31.62,37.08 v30.23,37.08 | VBAT.1 4.24,50.2 11.25,50.2 12.56,48.9 13.21,48.9 13.08,48.77 C18.1
  Bottom 0.508: VBAT.1 23.62,30.48 L3.1 | v28.45,33.78 30.23,35.56 v30.23,37.08 | L3.1 v23.62,22.35 | L2.1 L3.1
VREF5  (via drill 0.35)
  Top 0.33: 76.2,29.09 59.31,29.09 | 59.31,29.09 51.56,29.09 | 76.2,29.09 86.61,29.09 88.78,29.09 | 88.78,29.09 100.08,29.09 | 100.08,29.09 111.94,29.09 113.72,27.3 U5.1 | U3.1 53.34,27.3 51.56,29.09 | U6.1 77.98,27.3 76.2,29.09 | U4.1 101.86,27.3 100.08,29.09 | 5VBOOST.6 26.77,36.73 28.06,35.44 | 28.06,35.44 C26.1 C24.1 C25.1 42.42,29.09 51.56,29.09 | 28.06,35.44 23.87,31.24 19.3,31.24 18.54,32 18.54,37.47 R42.2 | U7.24 67.03,36.68 C39.1 63.59,33.24 v63.5,33.24 | v61.98,31.75 59.31,29.09 | 88.78,29.09 v89.41,29.72
  Bottom 0.33: v63.5,33.24 62.01,31.75 v61.98,31.75 | v89.41,29.72 89.41,30.73 JP1.2
VREF12
  Top 0.33: 12VBOOST.6 26.32,20.22 27.23,21.13 29.76,21.13 30.85,22.22 C32.1 C31.1 C30.1
  Top 0.432: DIGIT4.1 123.15,2.25 98.81,2.25 | 74.42,2.25 49.13,2.25 47.32,4.06 47.36,4.06 | 74.42,2.25 98.81,2.25 | DIGIT3.1 98.81,2.29 98.81,2.25 | DIGIT2.1 74.42,2.29 74.42,2.25 | DIGIT1.1 47.36,4.06 | R45.2 37.47,11.75 38.57,12.85 | C30.1 38.2,20.09 38.24,20.09 38.64,19.7 38.64,12.92 38.57,12.85 | 38.57,12.85 47.36,4.06
  Bottom 0.406: DIGIT1.1 DIGIT1.2 | DIGIT3.1 DIGIT3.2 | DIGIT4.1 DIGIT4.2 | DIGIT2.1 DIGIT2.2
  Bottom 0.432: JP1.3 154.55,11.32 154.55,6.14 153.88,5.47 150.41,5.47 149.75,6.14 149.75,6.79 148.8,7.73 127.51,7.73 127.04,7.73 126.1,7.73 DIGIT4.2
VREF33
  Top 0.254: U2.48 87.04,45.76 C9.2 | U1.4 17.55,49.1 17.76,48.9 C37.1 | MIC1.4 148.34,17.27 136.08,29.53 103.44,29.53 C8.2 | 96.52,37.38 97,36.9 97,36.3 98.51,34.8 | C8.2 100.2,33.11 98.51,34.8 | 98.51,34.8 C11.1 C8.2
  Top 0.33: 88.39,34.29 87.25,34.29 C12.1 | 88.39,34.29 87.85,34.84 U2.64 | 97.98,43.88 U2.32 | 97.98,43.88 99.08,44.98 99.08,46.5 99.27,46.68 99.39,46.68 C14.2 100.85,47.5 102.07,48.72 109.93,48.72 JP1.1 | 89.72,35.62 89.72,44.2 | 89.72,44.2 U2.48 | 93.98,37.38 91.48,37.38 | 93.98,37.38 96.52,37.38 U2.19 | U2.13 95.72,35.64 93.98,37.38 | 88.61,34.51 89.72,35.62 | 89.72,35.62 91.48,37.38 | 91.48,37.38 97.98,43.88 | 88.39,34.29 88.61,34.51 | 88.61,34.51 U2.1 | 89.72,44.2 88.45,45.47 C9.2 C10.2 | C36.1 9.14,36.71 9.14,30.5 3.64,24.99 3.64,19.2 4.85,17.99 4.85,14.29 2.78,12.21 2.78,11.15 3.53,10.4 3.95,10.4 R1.1 R2.1 R3.1 15.28,5.2 17.16,3.33 26.02,3.33 27.9,5.2 32.64,5.2 | 32.64,5.2 33.78,6.35 | MIC0.3 33.53,4.31 32.64,5.2 | C13.2 86.87,32.77 | 86.87,32.77 88.39,34.29 | C37.1 19.95,48.9 21.17,50.11 28.88,50.11 46.45,32.54 70.87,32.54 | 70.87,32.54 LEDMCU.A 76.68,31.55 85.65,31.55 86.87,32.77 | U7.2 U7.1 72.67,36.68 | 72.67,36.68 C38.1 73.79,35.46 72.67,34.34 | 72.67,36.68 72.67,34.34 | 70.87,32.54 72.67,34.34
  Top 0.508: MIC0.3 MIC0.4 | MIC0.5 MIC0.6 | MIC0.6 33.78,6.35 MIC0.4 | MIC0.3 MIC0.5 | MIC0.5 MIC0.4 | MIC0.3 MIC0.6 | MIC1.3 MIC1.4 | MIC1.4 MIC1.6 | MIC1.5 MIC1.4 | MIC1.3 MIC1.5 | MIC1.5 MIC1.6 | MIC1.6 MIC1.3 | C36.1 C37.1

## Text on the board
tNames: ECE 445: Senior Design Laboratory | Team 31: Voice Activated Scorekeeper | Jason Hwang / Chris Kalebich / Allan Zou